# EAGLE board MinibotPCB (EAGLE 9.3.2)
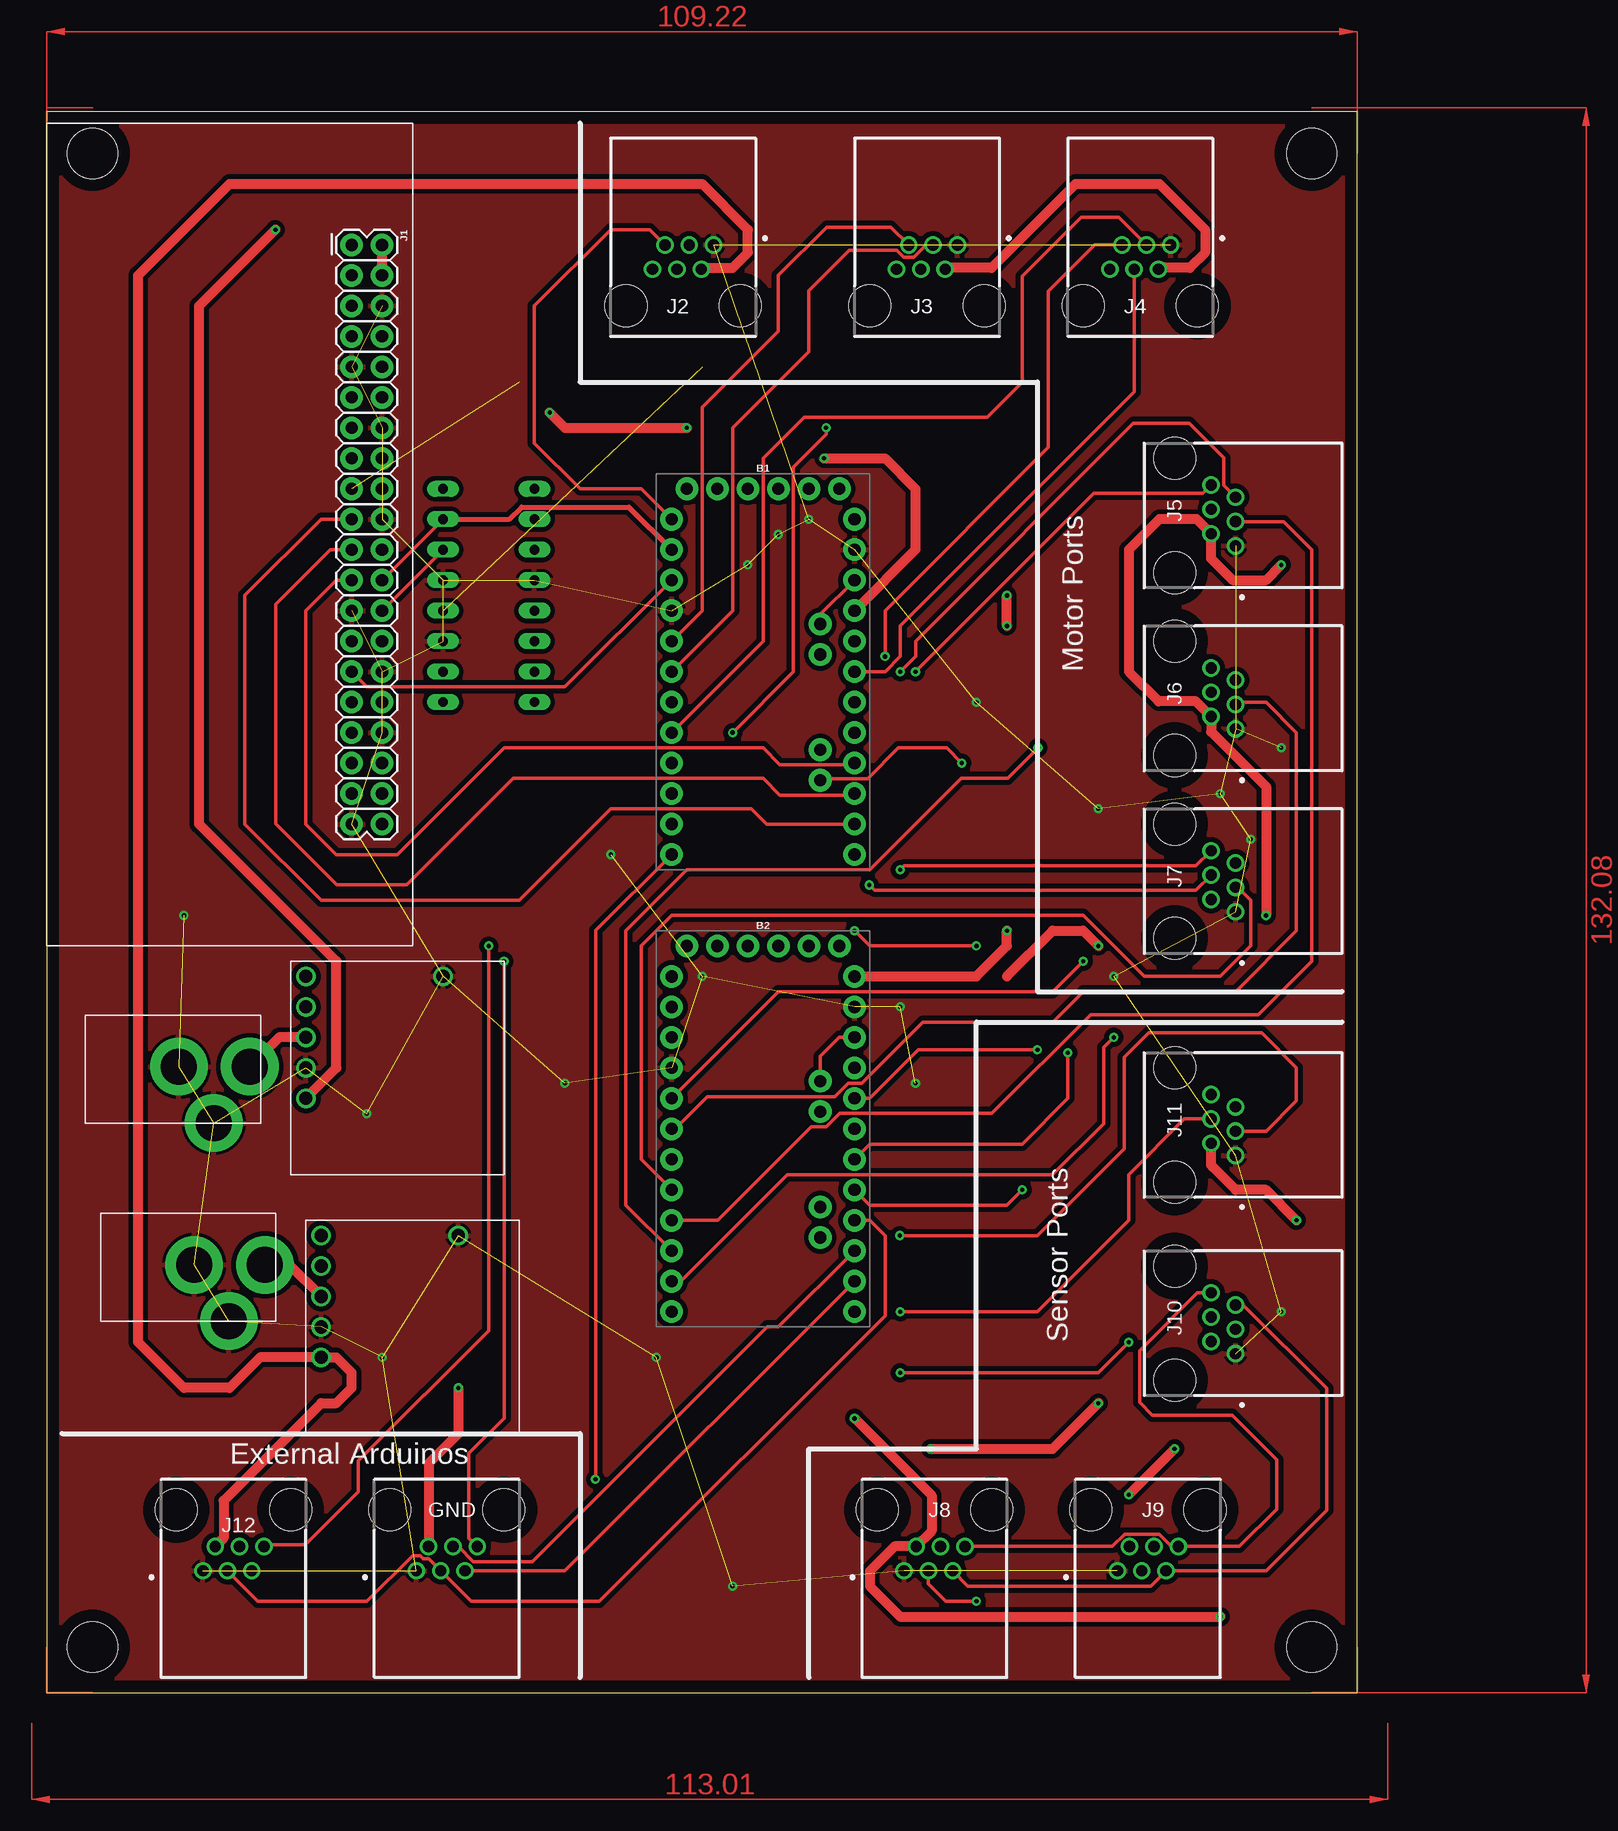
[diagram p0: board, top side]
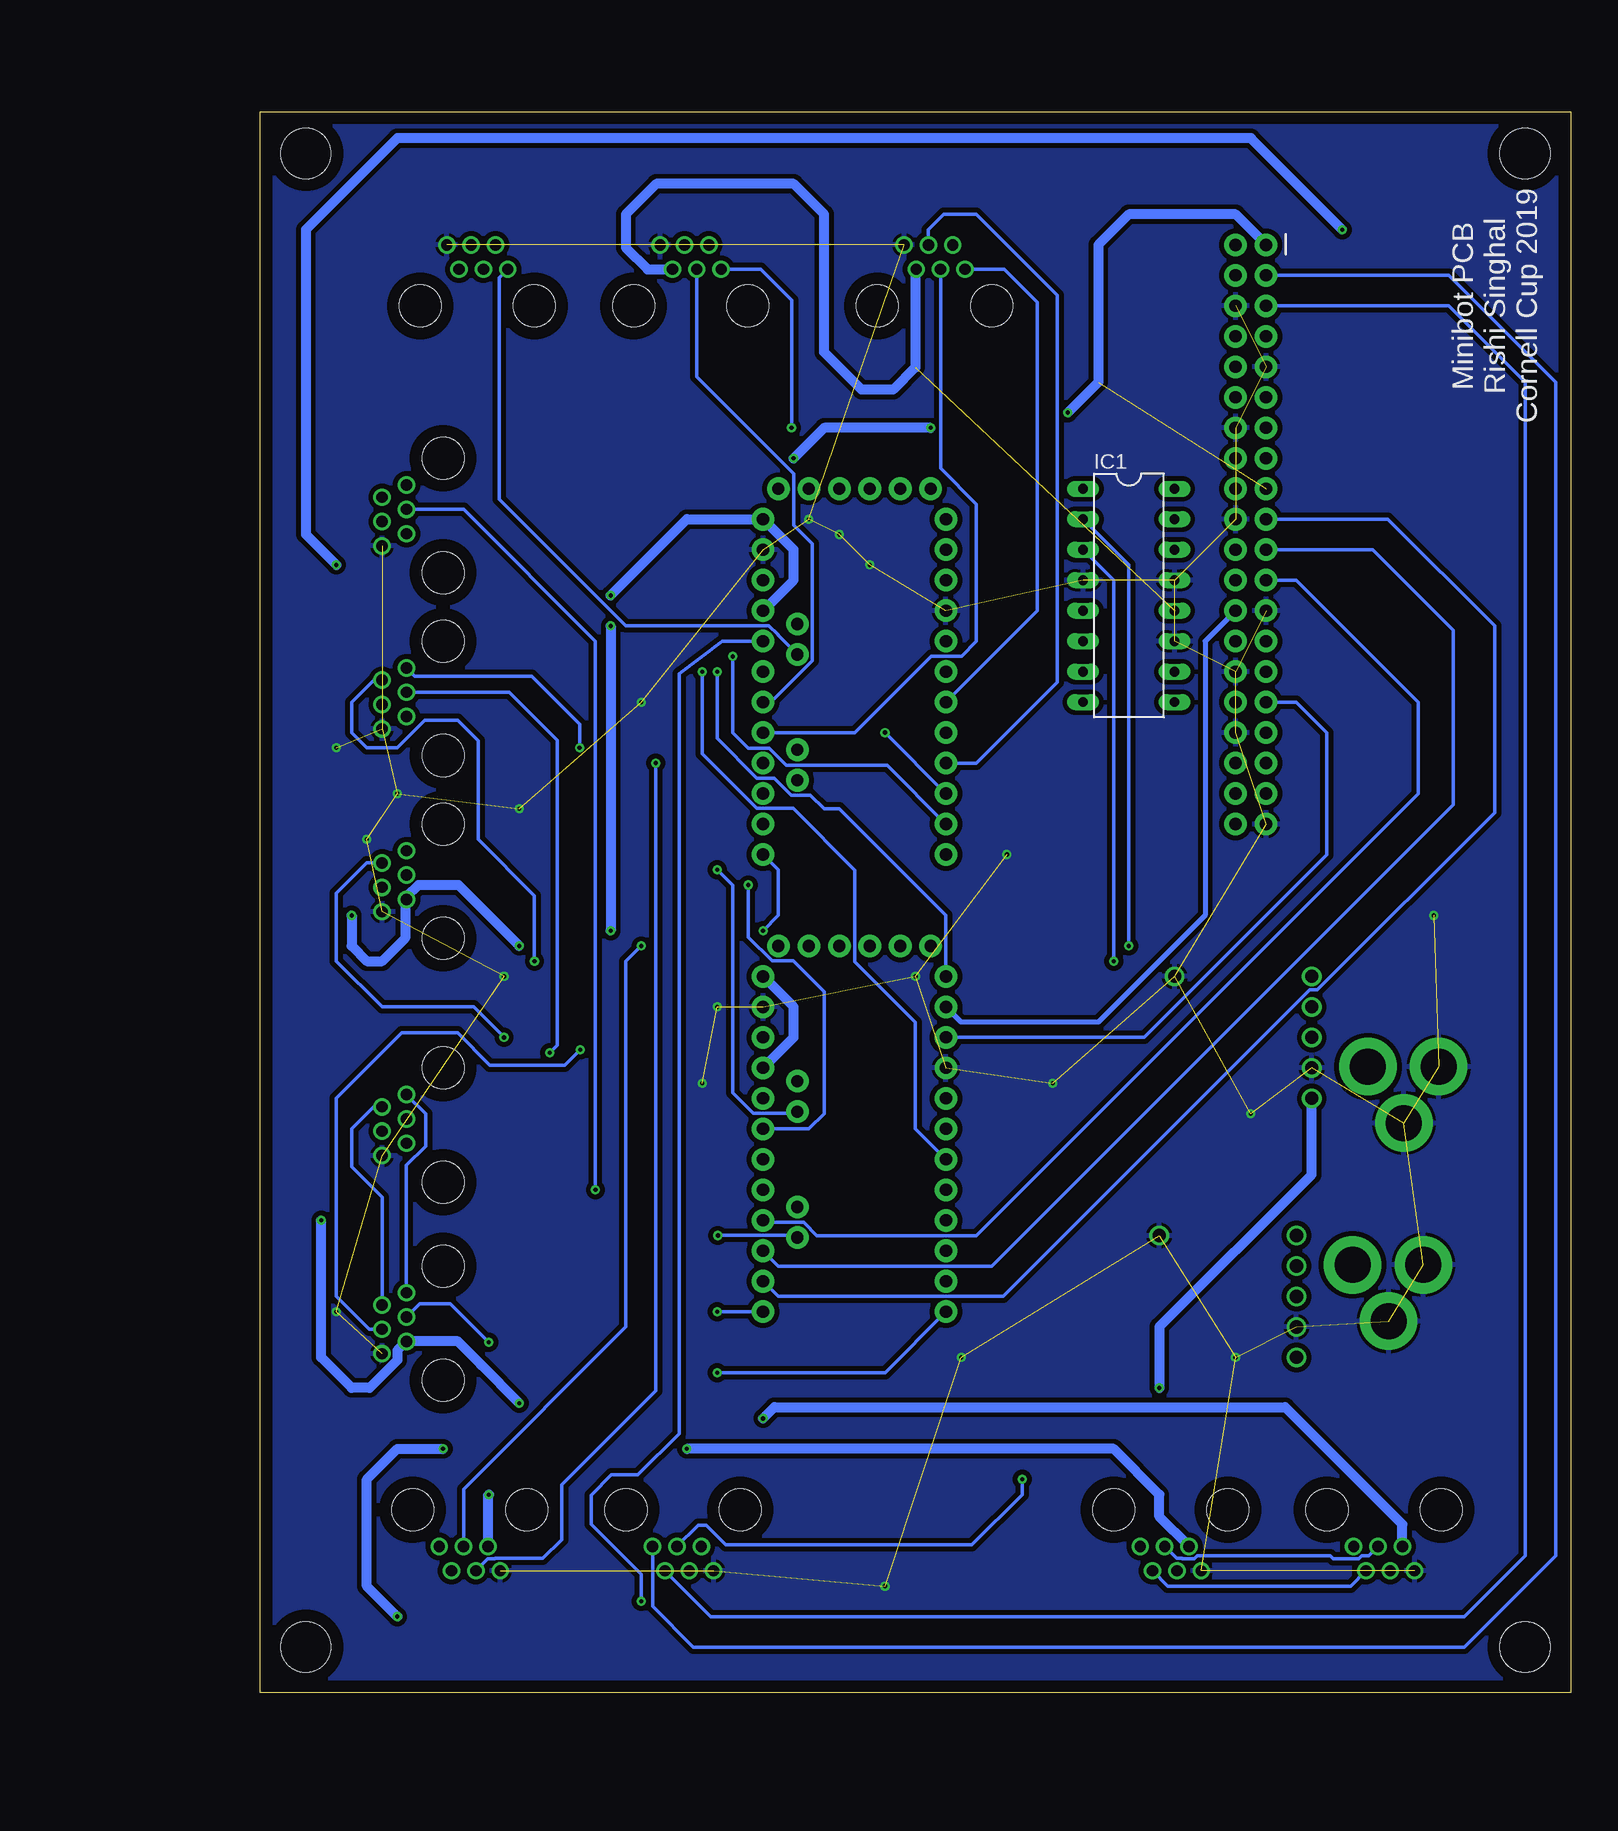
[diagram p1: board, bottom side, seen from below]

Size 109.2 x 131.75 mm. Coordinates in mm from the lower left corner, seen from the top.
Outline: 0,0 109.2,0 109.2,131.75 0,131.75 0,0
Copper layers (1*16): Top 0.035mm / dielectric 1.5mm / Bottom 0.035mm
Design rules "default": minimum track width 6mil, minimum drill 0.35mm, track to track 6mil, track to pad 6mil, pad to pad 6mil, via to via 6mil, smd to smd 6mil, copper to edge 40mil, drill to drill 6mil, minimum pad ring 10mil, minimum via ring 8mil, stop-mask expansion 4mil, vias tented up to drill 0mil, thermal gap 10mil
Holes 4.17 mm at 3.81,128.27 105.41,128.27 3.81,3.81 105.41,3.81

## Footprints (pad centres in the part's own frame; a part is rotated, then mirrored left to right if it is on the bottom)
ARDUINO_PRO_MINI = drill 1.016 pad 1.88: 1 -7.62,12.7; 2 -7.62,10.16; 3 -7.62,7.62; 4 -7.62,5.08; 5 -7.62,2.54; 6 -7.62,0; 7 -7.62,-2.54; 8 -7.62,-5.08; 9 -7.62,-7.62; 10 -7.62,-10.16; 11 -7.62,-12.7; 12 -7.62,-15.24; 13 7.62,-15.24; 14 7.62,-12.7; 15 7.62,-10.16; 16 7.62,-7.62; 17 7.62,-5.08; 18 7.62,-2.54; 19 7.62,0; 20 7.62,2.54; 21 7.62,5.08; 22 7.62,7.62; 23 7.62,10.16; 24 7.62,12.7; A4 4.763,1.429; A5 4.763,3.969; A6 4.763,-9.049; A7 4.763,-6.509; BLK -6.35,15.24; GND -3.81,15.24; GRN 6.35,15.24; RXI 1.27,15.24; TXO 3.81,15.24; VCC -1.27,15.24
RJE0166001_1 = drill 0.94 pad 1.44: 1 8.575,7.62; 2 7.555,5.59; 3 6.545,7.62; 4 5.525,5.59; 5 4.515,7.62; 6 3.495,5.59 | hole 3.49: 1.275,2.54; 10.795,2.54
DIL16 = drill 0.813 long: 1 -8.89,-3.81; 2 -6.35,-3.81; 3 -3.81,-3.81; 4 -1.27,-3.81; 5 1.27,-3.81; 6 3.81,-3.81; 7 6.35,-3.81; 8 8.89,-3.81; 9 8.89,3.81; 10 6.35,3.81; 11 3.81,3.81; 12 1.27,3.81; 13 -1.27,3.81; 14 -3.81,3.81; 15 -6.35,3.81; 16 -8.89,3.81
2X20 = drill 1.016 pad 1.88: 1 0,0; 2 0,2.54; 3 2.54,0; 4 2.54,2.54; 5 5.08,0; 6 5.08,2.54; 7 7.62,0; 8 7.62,2.54; 9 10.16,0; 10 10.16,2.54; 11 12.7,0; 12 12.7,2.54; 13 15.24,0; 14 15.24,2.54; 15 17.78,0; 16 17.78,2.54; 17 20.32,0; 18 20.32,2.54; 19 22.86,0; 20 22.86,2.54; 21 25.4,0; 22 25.4,2.54; 23 27.94,0; 24 27.94,2.54; 25 30.48,0; 26 30.48,2.54; 27 33.02,0; 28 33.02,2.54; 29 35.56,0; 30 35.56,2.54; 31 38.1,0; 32 38.1,2.54; 33 40.64,0; 34 40.64,2.54; 35 43.18,0; 36 43.18,2.54; 37 45.72,0; 38 45.72,2.54; 39 48.26,0; 40 48.26,2.54
D24V22F5 = drill 1.092: P$1 -7.62,5.08; P$2 -7.62,2.54; P$3 -7.62,0; P$4 -7.62,-2.54; P$5 -7.62,-5.08; P$6 3.81,5.08
PJ-102A = drill 3 pad 4.8: RING 0.1,-3.39; RING_SW -4.6,-6.29; TIP 0.1,-9.29

## Placement (x,y rotation side)
B1  ARDUINO_PRO_MINI  [ARDUINO_PRO_MINI]  59.69,85.09 0 top
B2  ARDUINO_PRO_MINI  [ARDUINO_PRO_MINI]  59.69,46.99 0 top
GND  RJE0166001  [RJE0166001_1]  39.37,17.78 180 top
IC1  74AC11139  [DIL16]  36.83,91.44 270 bottom
J1  RASPBERRYPI-40-PIN-GPIO_PTH_NO_SHROUD  [2X20]  25.4,120.65 270 top
J2  RJE0166001  [RJE0166001_1]  46.99,113.03 0 top
J3  RJE0166001  [RJE0166001_1]  67.31,113.03 0 top
J4  RJE0166001  [RJE0166001_1]  85.09,113.03 0 top
J5  RJE0166001  [RJE0166001_1]  91.44,104.14 270 top
J6  RJE0166001  [RJE0166001_1]  91.44,88.9 270 top
J7  RJE0166001  [RJE0166001_1]  91.44,73.66 270 top
J8  RJE0166001  [RJE0166001_1]  80.01,17.78 180 top
J9  RJE0166001  [RJE0166001_1]  97.79,17.78 180 top
J10  RJE0166001  [RJE0166001_1]  91.44,36.83 270 top
J11  RJE0166001  [RJE0166001_1]  91.44,53.34 270 top
J12  RJE0166001  [RJE0166001_1]  21.59,17.78 180 top
U$1  D24V22F5  [D24V22F5]  29.21,54.61 0 top
U$2  D24V22F5  [D24V22F5]  30.48,33.02 0 top
U$3  PJ_102A  [PJ-102A]  7.62,52.07 90 top
U$9  PJ_102A  [PJ-102A]  8.89,35.56 90 top

## Library data of the parts
B1 B2 J1 U$1-U$3 U$9 = JP
GND J2-J12 = RJE0166001; DESCRIPTION: 6P6C modular jack, Single Port, No Shield; HEIGHT: mm; MANUFACTURER_NAME: Amphenol; MANUFACTURER_PART_NUMBER: RJE0166001
IC1 = 74ac-logic

## Nets
3.3V: B1.21 B1.24 B2.21 B2.24 J1.1 J1.17
5V: J1.2 J1.4
5V_2: GND.2 J5.2 J6.2 J7.2 J10.2 J11.2 U$1.P$5
ADC0: B1.17 J2.4
ADC0_2: B2.17 J5.4
ADC1: B1.18 J3.4
ADC1_2: B2.18 J6.4
ADC2: B1.19 J4.4
ADC2_2: B2.19 J7.4
ADC3: B1.20 J8.3
ADC3_2: B2.20 J10.3
ADC4: B1.A4 J4.6
ADC4_2: B2.A4 J7.6
ADC5: B1.A6 J9.3
ADC5_2: B2.A6 J11.3
ADU_RESET_ADU: B1.22 B1.A5
ADU_RESET_ADU_2: B2.22 B2.A5
ADU_RESET_PI: B1.3 J1.29
ADU_RESET_PI_2: B2.3 J1.31
CE0: B1.2 IC1.15 J1.24
CE1: B2.2 IC1.14 J1.26
GND: B1.4 B1.23 B2.4 B2.23 GND.1 IC1.4 IC1.11 IC1.13 J1.6 J1.9 J1.14 J1.20 J1.25 J1.30 J1.34 J1.39 J2.1 J3.1 J4.1 J5.1 J6.1 J7.1 J8.1 J9.1 J10.1 J11.1 J12.1 U$1.P$4 U$1.P$6 U$2.P$4 U$2.P$6 U$3.RING U$3.RING_SW U$9.RING U$9.RING_SW
MISO: B1.15 B2.15 GND.4 J1.21 J12.4
MOSI: B1.14 B2.14 GND.5 J1.19 J12.5
N$63: IC1.5
N$64: IC1.6
N$65: IC1.7
N$66: IC1.8
N$67: IC1.10
N$68: IC1.9
POWER: U$2.P$3 U$9.TIP
POWER_2: U$1.P$3 U$3.TIP
S1: B1.1 J2.5
S1_2: B2.1 J5.5
S2: B1.5 J3.5
S2_2: B2.5 J6.5
S3: B1.6 J3.3
S3_2: B2.6 J6.3
S4: B1.7 J2.6
S4_2: B2.7 J5.6
S5: B1.8 J4.3
S5_2: B2.8 J7.3
S6: B1.9 J2.3
S6_2: B2.9 J5.3
S7: B1.10 J3.6
S7_2: B2.10 J6.6
S8: B1.11 J4.5
S8_2: B2.11 J7.5
S9: B1.12 J8.4
S9_2: B2.12 J10.4
S10: B1.13 J9.4
S10_2: B2.13 J11.4
SCL_PI: J1.5 J8.5 J9.5 J10.5 J11.5
SCLK: B1.16 B2.16 GND.3 J1.23 J12.3
SDA_PI: J1.3 J8.6 J9.6 J10.6 J11.6
SS0: IC1.16
SS1: IC1.1
SS2: IC1.2 J12.6
SS3: GND.6 IC1.3
V5: IC1.12 J2.2 J3.2 J4.2 J8.2 J9.2 J12.2 U$2.P$5

## Tracks (layer width: path | path; a pad name or v marks a point on that pad's centre or on a via)
3.3V  (via drill 0.35)  (1 unrouted)
  Top 0.813: v41.91,106.68 43.18,105.41 v53.34,105.41 | v64.77,102.87 69.85,102.87 72.39,100.33 72.39,95.25 B1.21 | B2.24 77.47,59.69 80.01,62.23 v80.01,63.5 | v80.01,88.9 v80.01,91.44
  Bottom 0.813: B2.24 64.77,57.15 64.77,54.61 B2.21 | B1.21 64.77,92.71 64.77,95.25 B1.24 73.66,97.79 v80.01,91.44 | J1.1 27.94,123.19 36.83,123.19 39.37,120.65 39.37,109.22 v41.91,106.68 | v53.34,105.41 62.23,105.41 v64.77,102.87 | v80.01,88.9 v80.01,63.5
5V
  Top 0.813: J1.4 J1.2
5V_2  (via drill 0.35)
  Top 0.813: v34.29,25.4 34.29,21.59 31.82,19.11 GND.2 | v73.66,20.32 83.82,20.32 v87.63,24.13 | v104.14,39.37 101.6,41.91 99.06,41.91 97.15,43.82 97.15,43.86 97.03,43.97 J11.2 | 80.01,59.69 83.82,63.5 86.36,63.5 v87.63,62.23 | U$1.P$5 24.13,52.07 24.13,60.96 12.7,72.39 12.7,115.57 v19.05,121.92 | v101.6,64.77 101.6,75.5 97.03,80.08 J6.2 95.76,82.61 92.64,82.61 90.17,85.09 90.17,95.25 92.71,97.79 95.83,97.79 J5.2 97.03,94.51 98.83,92.71 101.6,92.71 v102.87,93.98
  Bottom 0.813: U$1.P$5 21.59,43.18 34.29,30.48 v34.29,25.4 | GND.2 34.29,14.66 34.29,16.51 38.1,20.32 v73.66,20.32 | v87.63,24.13 90.81,27.31 90.81,27.35 92.74,29.27 J10.2 97.78,28.53 97.78,27.72 100.1,25.4 101.6,25.4 104.14,27.94 v104.14,39.37 | v19.05,121.92 26.67,129.54 97.79,129.54 105.41,121.92 105.41,96.52 v102.87,93.98 | v87.63,62.23 87.63,62.26 92.68,67.31 96.04,67.31 97.03,66.32 J7.2 97.15,65.99 97.15,62.87 99.06,60.96 100.33,60.96 101.6,62.23 v101.6,64.77
ADC0
  Bottom 0.305: J2.4 52.52,102.05 49.53,99.06 49.53,87.63 50.77,86.39 53.31,86.39 59.69,80.01 B1.17
ADC0_2  (via drill 0.35)
  Top 0.305: v81.28,41.91 80.01,40.64 68.58,40.64 B2.17
  Bottom 0.305: v81.28,41.91 81.28,87.63 92.27,98.61 J5.4
ADC1
  Bottom 0.305: B1.18 66.66,82.55 63.21,86 63.21,95.74 64.75,97.27 64.75,101.58 72.83,109.67 J3.4
ADC1_2  (via drill 0.35)
  Top 0.305: 67.06,44.2 B2.18 68.58,45.72 81.28,45.72 85.09,49.53 v85.09,53.34
  Bottom 0.305: v85.09,53.34 84.46,53.97 84.46,79.38 88.45,83.38 J6.4
ADC2
  Top 0.305: B1.19 69.85,85.09 71.12,86.36 71.12,88.9 90.61,108.39 J4.4
ADC2_2  (via drill 0.35)
  Top 0.305: v68.53,67.31 68.98,66.86 95.76,66.86 J7.4
  Bottom 0.305: B2.19 63.5,46.99 62.23,48.26 62.23,58.42 64.8,60.98 66.56,60.98 68.53,62.97 v68.53,67.31
ADC3  (via drill 0.35)
  Top 0.305: v77.47,7.62 74.93,7.62 73.47,9.09 J8.3
  Bottom 0.305: B1.20 70.7,87.63 74.3,84.93 74.3,21.59 77.73,18.15 79.94,18.15 81.65,16.45 81.65,14.03 77.47,9.86 v77.47,7.62
ADC3_2  (via drill 0.35)
  Top 0.305: B2.20 68.58,49.53 72.63,53.58 v82.55,53.58
  Bottom 0.305: v82.55,53.58 83.82,52.31 90.1,52.31 92.77,54.98 97.42,54.98 102.87,49.53 102.87,33.02 100.14,30.29 J10.3
ADC4
  Bottom 0.305: B1.A4 66.06,88.13 66.06,88.15 66.82,88.9 78.74,88.9 89.28,99.44 89.28,117.93 J4.6
ADC4_2  (via drill 0.35)
  Top 0.305: J7.6 95.76,68.89 71.44,68.89 v71.12,68.58
  Bottom 0.305: v71.12,68.58 69.85,67.31 69.85,50.01 68.13,48.28 64.59,48.28 B2.A4
ADC5  (via drill 0.35)
  Top 0.305: v76.25,77.47 74.98,78.74 70.96,78.74 68.4,76.17 64.59,76.17 B1.A6
  Bottom 0.305: 90.67,10.16 J9.3 90.24,11.16 89.67,11.16 89.64,11.19 85.66,11.19 84.08,12.76 84.08,17.32 76.25,25.15 v76.25,77.47
ADC5_2  (via drill 0.35)
  Top 0.305: J11.3 101.6,46.8 104.14,49.34 104.14,52.07 101.23,54.98 91.81,54.98 89.8,52.97 89.8,45.35 82.55,38.1 v71.08,38.1
  Bottom 0.305: B2.A6 64.64,38.12 71.05,38.12 v71.08,38.1
ADU_RESET_ADU
  Top 0.305: 66.99,92.39 B1.22 64.45,89.85 B1.A5
ADU_RESET_ADU_2
  Top 0.305: B2.22 66.04,54.61 64.45,53.02 B2.A5
ADU_RESET_PI
  Top 0.305: B1.3 43.18,83.82 26.67,83.82 J1.29
ADU_RESET_PI_2
  Bottom 0.305: J1.31 22.86,82.55 20.32,80.01 20.32,69.85 35.56,54.61 B2.3
CE0
  Top 0.305: J1.24 IC1.15
  Top 0.406: IC1.15 38.54,97.79 39.56,98.81 48.51,98.81 B1.2
CE1
  Top 0.305: J1.26 IC1.14
  Bottom 0.406: J1.26 30.48,87.63 30.48,64.77 39.37,55.88 50.8,55.88 B2.2
GND  (via drill 0.35)  (54 unrouted)
  other vias: 26.67,48.26 43.18,50.8 57.15,8.89 50.8,27.94 27.94,27.94 11.43,64.77 77.47,82.55 46.99,69.85 87.63,73.66 54.61,59.69 72.39,50.8 71.12,57.15 97.79,74.93 102.87,78.74 102.87,31.75 100.33,71.12 88.9,59.69 58.42,93.98 63.5,97.79 60.96,96.52
  pour Bottom (isolate 0.406): 0,132.08 109.22,132.08 109.22,0 0,0
  pour Top (isolate 0.406): 0,132.08 109.22,132.08 109.22,0 0,0
MISO
  Top 0.305: J1.21 23.64,95.25 19.07,90.69 19.07,72.42 24.16,67.33 30.02,67.33 38.88,76.2 59.69,76.2 61.09,74.8 67.18,74.8 B1.15 67.26,74.93 | B2.15 60.96,30.48 60.02,30.48 40.46,10.92 35.55,10.92 34.28,12.19 GND.4
  Bottom 0.305: J1.21 16.51,95.25 9.8,88.54 9.8,74.02 48.26,35.56 66.04,35.56 B2.15 | J12.4 16.82,11.43 17.4,11.43 17.67,11.16 19.79,11.16 20.06,11.43 31.12,11.43 31.39,11.16 32.37,11.16 32.4,11.19 32.84,11.19 GND.4
MOSI
  Top 0.305: J1.19 22.86,97.79 16.51,91.44 16.51,72.39 22.86,66.04 39.37,66.04 46.99,73.66 58.72,73.66 59.99,72.39 B1.14 | GND.5 43.18,10.16 B2.14
  Bottom 0.305: GND.5 33.59,8.89 18.34,8.89 J12.5 | B2.14 66.04,33.02 47.31,33.02 21.76,58.57 21.12,58.57 6.35,73.34 6.35,88.9 15.24,97.79 J1.19
POWER
  Top 0.813: U$2.P$3 20.22,35.66 U$9.TIP
POWER_2
  Top 0.813: U$1.P$3 19.35,54.61 U$3.TIP
S1
  Top 0.305: J2.5 50.23,121.92 46.99,121.92 40.64,115.57 40.64,104.14 44.45,100.33 49.53,100.33 B1.1
S1_2  (via drill 0.35)
  Top 0.305: J5.5 98.06,100.63 98.06,102.91 95.19,105.78 90.55,105.78 72.4,87.62 72.4,86.35 v71.13,85.08
  Bottom 0.305: B2.1 52.07,64.77 60.96,73.66 62.23,73.66 63.37,74.8 64.97,74.8 66.4,76.22 67.83,76.22 71.13,79.53 v71.13,85.08
S2
  Top 0.305: B1.5 54.61,90.17 54.61,107.1 60.96,113.45 60.96,118.11 64.98,122.13 70.34,122.13 J3.5
S2_2  (via drill 0.35)
  Top 0.305: B2.5 60.96,58.42 83.82,58.42 v86.36,60.96
  Bottom 0.305: J6.5 99.77,84.39 101.6,82.55 101.6,80.01 100.33,78.74 97.79,78.74 95.51,81.02 92.77,81.02 91.07,79.31 91.07,71.12 86.36,66.41 v86.36,60.96
S3
  Top 0.305: B1.6 57.15,90.17 57.15,105.41 63.5,111.76 63.5,116.84 66.85,120.19 70.83,120.19 71.4,119.62 72.25,119.62 73.28,120.65 J3.3
S3_2
  Top 0.305: B2.6 52.37,46.99 55.05,49.66 65.68,49.66 66.79,50.77 67.91,50.77 73.01,55.88 83.82,55.88 86.36,58.42 99.06,58.42 104.14,63.5 104.14,80.01 101.6,82.55 99.25,82.55 J6.3
S4
  Bottom 0.305: B1.7 44.45,90.17 44.45,115.88 47.2,118.62 J2.6
S4_2  (via drill 0.35)
  Top 0.305: v72.39,85.09 87.25,99.95 96.34,99.95 J5.6
  Bottom 0.305: B2.7 54.61,46.99 54.61,55.88 59.66,60.94 59.66,68.56 64.8,73.69 67.83,73.69 72.39,78.25 v72.39,85.09
S5
  Top 0.305: B1.8 59.69,87.63 59.69,102.87 63.13,106.31 78.37,106.31 81.28,109.22 81.28,118.03 86.2,122.95 89.34,122.95 J4.3
S5_2
  Top 0.305: B2.8 49.53,44.45 49.53,62.23 52.07,64.77 86.36,64.77 91.44,59.69 97.79,59.69 100.33,62.23 100.33,66.04 99.25,67.11 J7.3
S6
  Bottom 0.305: J2.3 53.53,121.92 52.27,123.19 49.53,123.19 42.81,116.47 42.81,84.19 49.53,77.47 B1.9
S6_2
  Top 0.305: B2.9 55.89,39.37 63.7,47.17 64.97,47.17 66.08,48.28 78.77,48.28 87,56.52 100.97,56.52 105.41,60.96 105.41,95.25 103.06,97.59 J5.3
S7  (via drill 0.35)
  Top 0.305: 64.94,105.44 v64.94,105.41 64.94,104.87 62.2,102.14 62.2,85.06 v57.15,80.01
  Bottom 0.305: B1.10 v57.15,80.01 | v64.94,105.41 64.94,116.05 67.52,118.62 J3.6
S7_2  (via drill 0.35)
  Top 0.305: B2.10 48.26,40.64 48.26,63.5 53.34,68.58 68.58,68.58 76.2,76.2 80.06,76.2 v82.6,78.74
  Bottom 0.305: v82.6,78.74 82.6,80.71 86.61,84.71 96.34,84.71 J6.6
S8  (via drill 0.35)
  Top 0.305: v69.85,86.36 69.85,90.17 83.45,103.77 83.45,116.78 87.33,120.65 J4.5
  Bottom 0.305: B1.11 56.97,77.29 65.37,77.29 66.79,78.72 68.56,78.72 69.85,80.01 v69.85,86.36
S8_2  (via drill 0.35)
  Top 0.305: B2.11 52.85,34.29 61.71,43.16 83.8,43.16 88.07,47.43 88.07,53.78 v88.9,54.61
  Bottom 0.305: v88.9,54.61 91.44,57.15 99.06,57.15 102.87,60.96 102.87,66.61 100.33,69.14 J7.5
S9  (via drill 0.35)
  Top 0.305: v45.72,17.78 45.74,17.8 45.74,63.52 B1.12
  Bottom 0.305: v45.72,17.78 45.72,16.51 49.9,12.33 70.42,12.33 72.06,13.97 72.7,13.97 J8.4
S9_2  (via drill 0.35)
  Top 0.305: v71.12,26.67 87.63,26.67 v90.17,29.21
  Bottom 0.305: B2.12 57.15,26.67 v71.12,26.67 | v90.17,29.21 93.38,32.42 95.92,32.42 J10.4
S10  (via drill 0.35)
  Top 0.305: v77.47,62.23 68.58,62.23 v67.31,63.5
  Bottom 0.305: B1.13 66.04,68.58 66.04,64.77 v67.31,63.5 | v77.47,62.23 78.74,60.96 78.74,30.48 92.27,16.95 J9.4
S10_2  (via drill 0.35)
  Top 0.305: v71.13,31.74 82.54,31.74 90.17,39.37 90.17,43.18 94.81,47.81 J11.4
  Bottom 0.305: B2.13 v71.12,31.75 v71.13,31.74
SCL_PI
  Top 0.305: J8.5 76.77,8.89 92,8.89 J9.5 101.6,10.16 106.65,15.21 106.65,25.35 99.68,32.31 J10.5
  Bottom 0.305: J1.5 10.16,115.57 3.81,109.22 3.81,11.43 8.89,6.35 71.69,6.35 J8.5 | J10.5 99.06,41.27 101.6,43.81 101.6,46.99 99.77,48.83 J11.5
SCLK
  Top 0.305: B2.16 68.58,39.37 69.85,38.1 69.85,31.43 46.05,7.62 35.37,7.62 GND.3 31.82,11.16 31.39,11.16 31.12,11.43 30.48,11.43 26.67,7.62 17.59,7.62 J12.3 | J1.23 24.13,92.71 21.59,90.17 21.59,72.39 24.13,69.85 29.21,69.85 38.1,78.74 59.69,78.74 61.09,77.34 67.18,77.34 B1.16
  Bottom 0.305: J1.23 22.86,92.71 12.7,82.55 12.7,74.93 49.53,38.1 62.85,38.1 63.94,39.19 67.13,39.19 B2.16
SDA_PI
  Top 0.305: J8.6 88.78,12.19 89.81,13.22 92.69,13.22 93.72,12.19 J9.6 99.38,12.19 102.49,15.3 102.49,19.43 98.8,23.12 92.13,23.12 91.06,24.19 91.06,28.52 95.88,33.34 J10.6
  Bottom 0.305: J1.3 10.16,118.11 1.27,109.22 1.27,11.43 8.89,3.81 73.14,3.81 76.52,7.19 J8.6 | J10.6 97.03,43.94 95.42,45.55 95.42,48.23 J11.6
SS2  (via drill 0.35)
  Top 0.305: J12.6 18.23,12.33 21.54,12.33 25.96,16.75 25.96,19.34 31.46,24.84 31.5,24.84 36.83,30.18 v36.83,62.23
  Bottom 0.305: IC1.2 36.83,93.98 v36.83,62.23
SS3  (via drill 0.35)
  Top 0.305: v38.1,60.96 38.1,22.86 35.18,19.94 35.18,12.88 GND.6
  Bottom 0.305: IC1.3 38.1,92.71 v38.1,60.96
V5  (via drill 0.35)  (1 unrouted)
  Top 0.813: J12.2 14.73,12.88 14.73,16 22.86,24.13 24.13,24.13 25.4,25.4 25.4,26.67 24.13,27.94 U$2.P$5 17.78,27.94 15.24,25.4 11.43,25.4 7.62,29.21 7.62,118.11 15.24,125.73 54.61,125.73 58.42,121.92 58.42,120.01 57.15,118.74 54.66,118.74 J2.2 | J4.2 92.76,118.74 95.25,118.74 96.52,120.01 96.52,121.92 92.71,125.73 85.73,125.73 78.74,118.74 74.98,118.74 J3.2 | v67.31,22.86 73.72,16.45 73.72,13.46 J8.2 70.64,12.19 68.58,10.13 68.58,8.89 71.12,6.35 v97.79,6.35 | v93.98,20.32 v90.17,16.51
  Bottom 0.813: v67.31,22.86 66.37,23.8 23.8,23.8 14.04,14.04 J12.2 | v97.79,6.35 100.33,8.89 100.33,17.78 97.79,20.32 v93.98,20.32 | v90.17,16.51 90.23,16.45 J9.2 | J2.2 54.62,118.55 54.62,110.45 56.47,108.59 59.1,108.59 62.23,111.73 62.23,123.19 64.77,125.73 76.2,125.73 78.74,123.19 78.74,120.42 76.94,118.62 J3.2
(copper drawn outside any net)
  shapes: Top area x11

## Text on the board
tPlace: Motor Ports | Sensor Ports | External Arduinos
bPlace: Minibot PCB / Rishi Singhal / Cornell Cup 2019